# EAGLE board CSNE_Hirose_TDT_AdptBrd (EAGLE 7.4.0), part 1 of 2
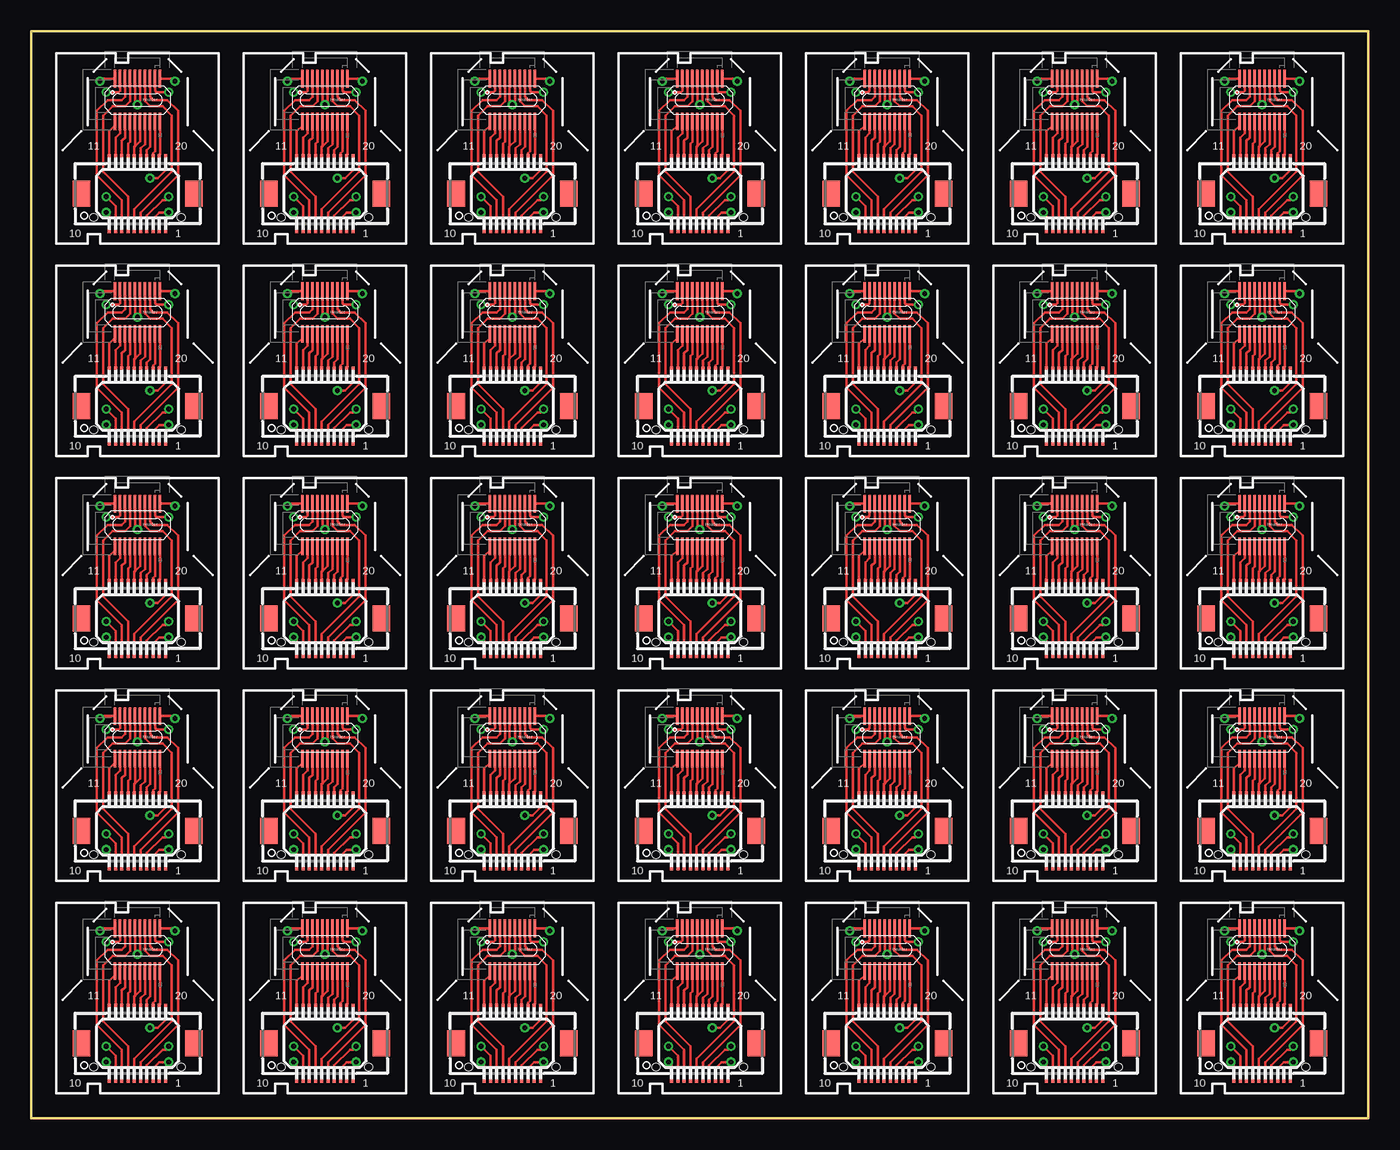
[diagram p0: board, top side]
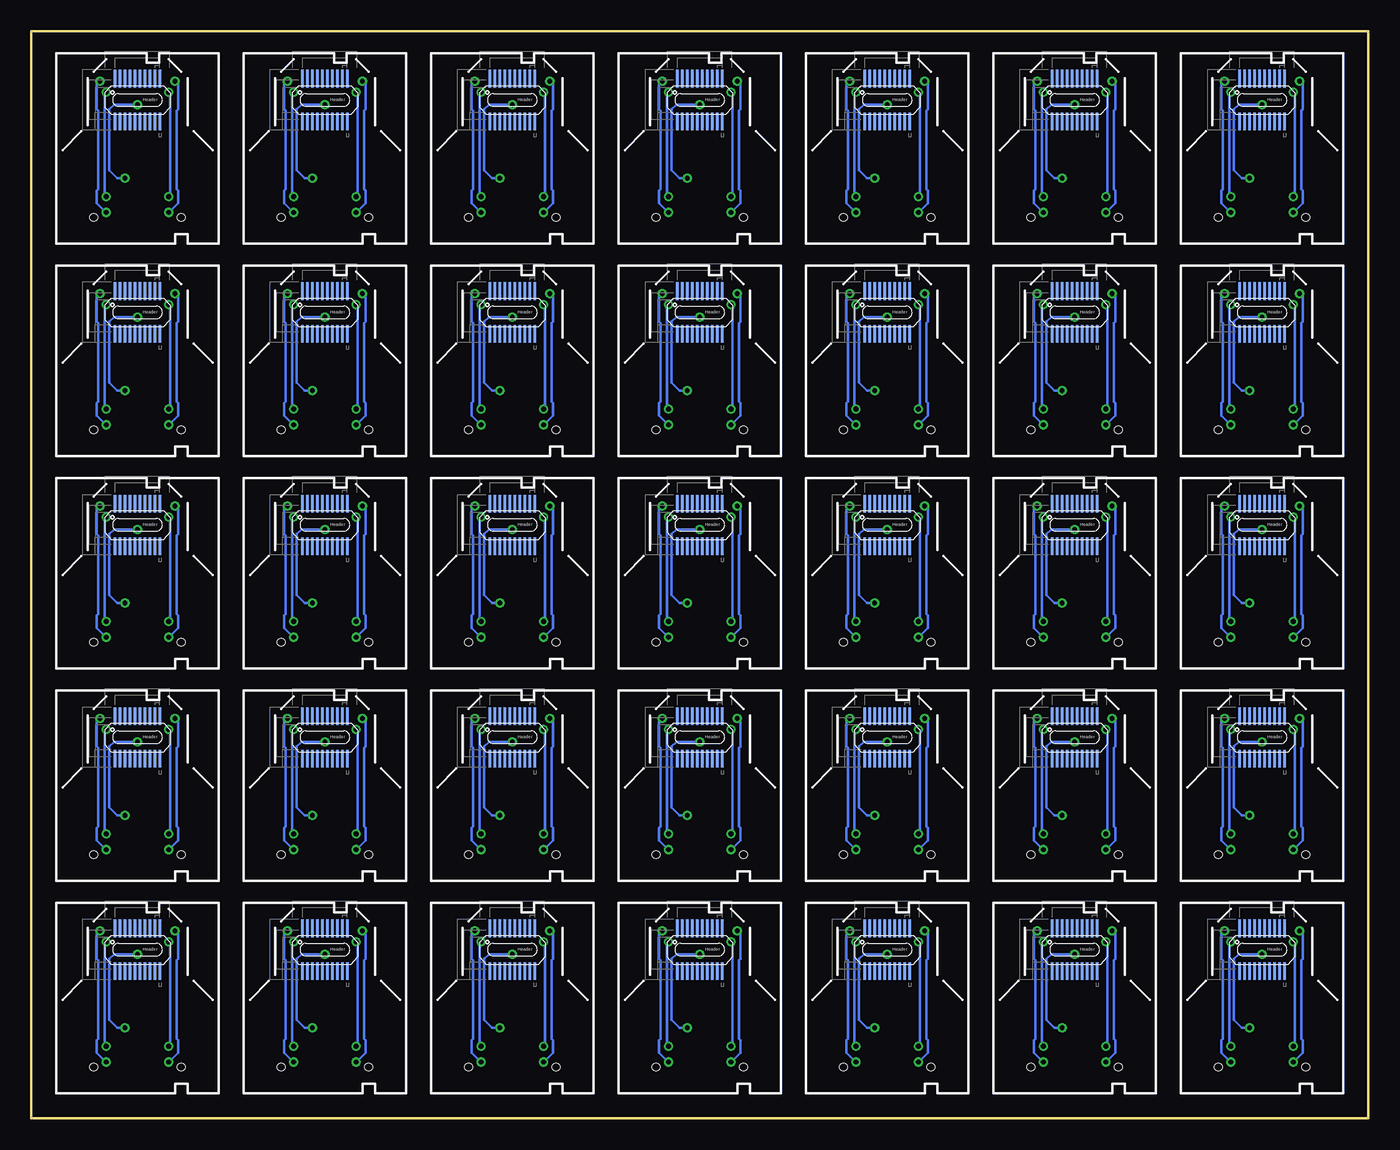
[diagram p1: board, bottom side, seen from below]

Size 107 x 87 mm. Coordinates in mm from the lower left corner, seen from the top.
Outline: 0,0 107,0 107,87 0,87 0,0
Copper layers (1*2*15*16): Top 0.035mm / dielectric 0.45mm / Route2 0.035mm / dielectric 0.5mm / Route15 0.035mm / dielectric 0.45mm / Bottom 0.035mm
Design rules "LaenPCBOrder_MOD_4layer": minimum track width 6mil, minimum drill 13mil, track to track 6mil, track to pad 6mil, pad to pad 6mil, via to via 6mil, smd to smd 6mil, copper to edge 15mil, drill to drill 6mil, minimum pad ring 7mil, minimum via ring 7mil, stop-mask expansion 3mil, vias tented up to drill 0mil, thermal gap 10mil

## Footprints (pad centres in the part's own frame; a part is rotated, then mirrored left to right if it is on the bottom)
DF30FC-20DP-0.4V = smd 0.23 x 1.4: P$1 -1.8,1.7; P$2 -1.4,1.7; P$3 -1,1.7; P$4 -0.6,1.7; P$5 -0.2,1.7; P$6 0.2,1.7; P$7 0.6,1.7; P$8 1,1.7; P$9 1.4,1.7; P$10 1.8,1.7; P$11 1.8,-1.7; P$12 1.4,-1.7; P$13 1,-1.7; P$14 0.6,-1.7; P$15 0.2,-1.7; P$16 -0.2,-1.7; P$17 -0.6,-1.7; P$18 -1,-1.7; P$19 -1.4,-1.7; P$20 -1.8,-1.7
CON-DF17-20F = smd 0.25 x 1.1: 1 -2.25,-2.6; 2 -2.25,2.6; 3 -1.75,-2.6; 4 -1.75,2.6; 5 -1.25,-2.6; 6 -1.25,2.6; 7 -0.75,-2.6; 8 -0.75,2.6; 9 -0.25,-2.6; 10 -0.25,2.6; 11 0.25,-2.6; 12 0.25,2.6; 13 0.75,-2.6; 14 0.75,2.6; 15 1.25,-2.6; 16 1.25,2.6; 17 1.75,-2.6; 18 1.75,2.6; 19 2.25,-2.6; 20 2.25,2.6 | smd 1.4 x 2.1: SIT1 -4.5,0; SIT2 4.5,0 | hole 0.6: -3.5,-1.9; 3.5,-1.9

## Placement (x,y rotation side)
U$1  DF30_HEADER  [DF30FC-20DP-0.4V]  8.5,13.5 0 top
U$2  DF30_HEADER  [DF30FC-20DP-0.4V]  8.5,13.5 0 bottom
U$3  CON-DF17-20F  [CON-DF17-20F]  8.5,6 0 top
U$4  DF30_HEADER  [DF30FC-20DP-0.4V]  8.5,30.5 0 bottom
U$5  DF30_HEADER  [DF30FC-20DP-0.4V]  8.5,30.5 0 top
U$6  CON-DF17-20F  [CON-DF17-20F]  8.5,23 0 top
U$7  DF30_HEADER  [DF30FC-20DP-0.4V]  23.5,30.5 0 bottom
U$8  DF30_HEADER  [DF30FC-20DP-0.4V]  23.5,30.5 0 top
U$9  CON-DF17-20F  [CON-DF17-20F]  23.5,23 0 top
U$10  DF30_HEADER  [DF30FC-20DP-0.4V]  23.5,13.5 0 bottom
U$11  DF30_HEADER  [DF30FC-20DP-0.4V]  23.5,13.5 0 top
U$12  CON-DF17-20F  [CON-DF17-20F]  23.5,6 0 top
U$13  DF30_HEADER  [DF30FC-20DP-0.4V]  8.5,47.5 0 bottom
U$14  DF30_HEADER  [DF30FC-20DP-0.4V]  8.5,47.5 0 top
U$15  CON-DF17-20F  [CON-DF17-20F]  8.5,40 0 top
U$16  DF30_HEADER  [DF30FC-20DP-0.4V]  8.5,64.5 0 bottom
U$17  DF30_HEADER  [DF30FC-20DP-0.4V]  8.5,64.5 0 top
U$18  CON-DF17-20F  [CON-DF17-20F]  8.5,57 0 top
U$19  DF30_HEADER  [DF30FC-20DP-0.4V]  23.5,64.5 0 bottom
U$20  DF30_HEADER  [DF30FC-20DP-0.4V]  23.5,64.5 0 top
U$21  CON-DF17-20F  [CON-DF17-20F]  23.5,57 0 top
U$22  DF30_HEADER  [DF30FC-20DP-0.4V]  23.5,47.5 0 bottom
U$23  DF30_HEADER  [DF30FC-20DP-0.4V]  23.5,47.5 0 top
U$24  CON-DF17-20F  [CON-DF17-20F]  23.5,40 0 top
U$25  DF30_HEADER  [DF30FC-20DP-0.4V]  38.5,13.5 0 bottom
U$26  DF30_HEADER  [DF30FC-20DP-0.4V]  38.5,13.5 0 top
U$27  CON-DF17-20F  [CON-DF17-20F]  38.5,6 0 top
U$28  DF30_HEADER  [DF30FC-20DP-0.4V]  38.5,30.5 0 bottom
U$29  DF30_HEADER  [DF30FC-20DP-0.4V]  38.5,30.5 0 top
U$30  CON-DF17-20F  [CON-DF17-20F]  38.5,23 0 top
U$31  DF30_HEADER  [DF30FC-20DP-0.4V]  53.5,30.5 0 bottom
U$32  DF30_HEADER  [DF30FC-20DP-0.4V]  53.5,30.5 0 top
U$33  CON-DF17-20F  [CON-DF17-20F]  53.5,23 0 top
U$34  DF30_HEADER  [DF30FC-20DP-0.4V]  53.5,13.5 0 bottom
U$35  DF30_HEADER  [DF30FC-20DP-0.4V]  53.5,13.5 0 top
U$36  CON-DF17-20F  [CON-DF17-20F]  53.5,6 0 top
U$37  DF30_HEADER  [DF30FC-20DP-0.4V]  68.5,13.5 0 bottom
U$38  DF30_HEADER  [DF30FC-20DP-0.4V]  68.5,13.5 0 top
U$39  CON-DF17-20F  [CON-DF17-20F]  68.5,6 0 top
U$40  DF30_HEADER  [DF30FC-20DP-0.4V]  68.5,30.5 0 bottom
U$41  DF30_HEADER  [DF30FC-20DP-0.4V]  68.5,30.5 0 top
U$42  CON-DF17-20F  [CON-DF17-20F]  68.5,23 0 top
U$43  DF30_HEADER  [DF30FC-20DP-0.4V]  83.5,30.5 0 bottom
U$44  DF30_HEADER  [DF30FC-20DP-0.4V]  83.5,30.5 0 top
U$45  CON-DF17-20F  [CON-DF17-20F]  83.5,23 0 top
U$46  DF30_HEADER  [DF30FC-20DP-0.4V]  83.5,13.5 0 bottom
U$47  DF30_HEADER  [DF30FC-20DP-0.4V]  83.5,13.5 0 top
U$48  CON-DF17-20F  [CON-DF17-20F]  83.5,6 0 top
U$49  DF30_HEADER  [DF30FC-20DP-0.4V]  68.5,47.5 0 bottom
U$50  DF30_HEADER  [DF30FC-20DP-0.4V]  68.5,47.5 0 top
U$51  CON-DF17-20F  [CON-DF17-20F]  68.5,40 0 top
U$52  DF30_HEADER  [DF30FC-20DP-0.4V]  68.5,64.5 0 bottom
U$53  DF30_HEADER  [DF30FC-20DP-0.4V]  68.5,64.5 0 top
U$54  CON-DF17-20F  [CON-DF17-20F]  68.5,57 0 top
U$55  DF30_HEADER  [DF30FC-20DP-0.4V]  83.5,64.5 0 bottom
U$56  DF30_HEADER  [DF30FC-20DP-0.4V]  83.5,64.5 0 top
U$57  CON-DF17-20F  [CON-DF17-20F]  83.5,57 0 top
U$58  DF30_HEADER  [DF30FC-20DP-0.4V]  83.5,47.5 0 bottom
U$59  DF30_HEADER  [DF30FC-20DP-0.4V]  83.5,47.5 0 top
U$60  CON-DF17-20F  [CON-DF17-20F]  83.5,40 0 top
U$61  DF30_HEADER  [DF30FC-20DP-0.4V]  38.5,47.5 0 bottom
U$62  DF30_HEADER  [DF30FC-20DP-0.4V]  38.5,47.5 0 top
U$63  CON-DF17-20F  [CON-DF17-20F]  38.5,40 0 top
U$64  DF30_HEADER  [DF30FC-20DP-0.4V]  38.5,64.5 0 bottom
U$65  DF30_HEADER  [DF30FC-20DP-0.4V]  38.5,64.5 0 top
U$66  CON-DF17-20F  [CON-DF17-20F]  38.5,57 0 top
U$67  DF30_HEADER  [DF30FC-20DP-0.4V]  53.5,64.5 0 bottom
U$68  DF30_HEADER  [DF30FC-20DP-0.4V]  53.5,64.5 0 top
U$69  CON-DF17-20F  [CON-DF17-20F]  53.5,57 0 top
U$70  DF30_HEADER  [DF30FC-20DP-0.4V]  53.5,47.5 0 bottom
U$71  DF30_HEADER  [DF30FC-20DP-0.4V]  53.5,47.5 0 top
U$72  CON-DF17-20F  [CON-DF17-20F]  53.5,40 0 top
U$73  DF30_HEADER  [DF30FC-20DP-0.4V]  8.5,81.5 0 bottom
U$74  DF30_HEADER  [DF30FC-20DP-0.4V]  8.5,81.5 0 top
U$75  CON-DF17-20F  [CON-DF17-20F]  8.5,74 0 top
U$76  DF30_HEADER  [DF30FC-20DP-0.4V]  23.5,81.5 0 bottom
U$77  DF30_HEADER  [DF30FC-20DP-0.4V]  23.5,81.5 0 top
U$78  CON-DF17-20F  [CON-DF17-20F]  23.5,74 0 top
U$79  DF30_HEADER  [DF30FC-20DP-0.4V]  68.5,81.5 0 bottom
U$80  DF30_HEADER  [DF30FC-20DP-0.4V]  68.5,81.5 0 top
U$81  CON-DF17-20F  [CON-DF17-20F]  68.5,74 0 top
U$82  DF30_HEADER  [DF30FC-20DP-0.4V]  83.5,81.5 0 bottom
U$83  DF30_HEADER  [DF30FC-20DP-0.4V]  83.5,81.5 0 top
U$84  CON-DF17-20F  [CON-DF17-20F]  83.5,74 0 top
U$85  DF30_HEADER  [DF30FC-20DP-0.4V]  38.5,81.5 0 bottom
U$86  DF30_HEADER  [DF30FC-20DP-0.4V]  38.5,81.5 0 top
U$87  CON-DF17-20F  [CON-DF17-20F]  38.5,74 0 top
U$88  DF30_HEADER  [DF30FC-20DP-0.4V]  53.5,81.5 0 bottom
U$89  DF30_HEADER  [DF30FC-20DP-0.4V]  53.5,81.5 0 top
U$90  CON-DF17-20F  [CON-DF17-20F]  53.5,74 0 top
U$91  DF30_HEADER  [DF30FC-20DP-0.4V]  98.5,30.5 0 bottom
U$92  DF30_HEADER  [DF30FC-20DP-0.4V]  98.5,30.5 0 top
U$93  CON-DF17-20F  [CON-DF17-20F]  98.5,23 0 top
U$94  DF30_HEADER  [DF30FC-20DP-0.4V]  98.5,13.5 0 bottom
U$95  DF30_HEADER  [DF30FC-20DP-0.4V]  98.5,13.5 0 top
U$96  CON-DF17-20F  [CON-DF17-20F]  98.5,6 0 top
U$97  DF30_HEADER  [DF30FC-20DP-0.4V]  98.5,64.5 0 bottom
U$98  DF30_HEADER  [DF30FC-20DP-0.4V]  98.5,64.5 0 top
U$99  CON-DF17-20F  [CON-DF17-20F]  98.5,57 0 top
U$100  DF30_HEADER  [DF30FC-20DP-0.4V]  98.5,47.5 0 bottom
U$101  DF30_HEADER  [DF30FC-20DP-0.4V]  98.5,47.5 0 top
U$102  CON-DF17-20F  [CON-DF17-20F]  98.5,40 0 top
U$103  DF30_HEADER  [DF30FC-20DP-0.4V]  98.5,81.5 0 bottom
U$104  DF30_HEADER  [DF30FC-20DP-0.4V]  98.5,81.5 0 top
U$105  CON-DF17-20F  [CON-DF17-20F]  98.5,74 0 top

## Library data of the parts
U$1 U$2 U$4 U$5 U$7 U$8 U$10 U$11 U$13 U$14 U$16 U$17 U$19 U$20 U$22 U$23 U$25 U$26 U$28 U$29 U$31 U$32 U$34 U$35 U$37 U$38 U$40 U$41 U$43 U$44 U$46 U$47 U$49 U$50 U$52 U$53 U$55 U$56 U$58 U$59 U$61 U$62 U$64 U$65 U$67 U$68 U$70 U$71 U$73 U$74 U$76 U$77 U$79 U$80 U$82 U$83 U$85 U$86 U$88 U$89 U$91 U$92 U$94 U$95 U$97 U$98 U$100 U$101 U$103 U$104 = TDT_Connectors
U$3 U$6 U$9 U$12 U$15 U$18 U$21 U$24 U$27 U$30 U$33 U$36 U$39 U$42 U$45 U$48 U$51 U$54 U$57 U$60 U$63 U$66 U$69 U$72 U$75 U$78 U$81 U$84 U$87 U$90 U$93 U$96 U$99 U$102 U$105 = hirose_DF17

## Nets
N$1: U$1.P$1 U$3.1
N$2: U$1.P$2 U$3.3
N$3: U$1.P$3 U$3.5
N$4: U$1.P$4 U$3.7
N$5: U$1.P$5 U$1.P$6 U$3.20
N$7: U$1.P$7 U$3.9
N$8: U$1.P$8 U$3.11
N$9: U$1.P$9 U$3.13
N$10: U$1.P$10 U$3.15
N$11: U$1.P$11 U$3.18
N$12: U$1.P$12 U$3.16
N$13: U$1.P$13 U$3.14
N$14: U$1.P$14 U$3.12
N$15: U$5.P$1 U$6.1
N$16: U$1.P$15 U$1.P$16 U$3.10
N$17: U$1.P$17 U$3.8
N$18: U$1.P$18 U$3.6
N$19: U$1.P$19 U$3.4
N$20: U$1.P$20 U$3.2
N$21: U$5.P$2 U$6.3
N$22: U$5.P$3 U$6.5
N$23: U$5.P$4 U$6.7
N$24: U$5.P$5 U$5.P$6 U$6.20
N$25: U$5.P$7 U$6.9
N$26: U$5.P$8 U$6.11
N$27: U$5.P$9 U$6.13
N$28: U$5.P$10 U$6.15
N$29: U$5.P$11 U$6.18
N$30: U$5.P$12 U$6.16
N$31: U$5.P$13 U$6.14
N$32: U$5.P$14 U$6.12
N$33: U$5.P$15 U$5.P$16 U$6.10
N$34: U$5.P$17 U$6.8
N$35: U$5.P$18 U$6.6
N$36: U$5.P$19 U$6.4
N$37: U$5.P$20 U$6.2
N$38: U$8.P$1 U$9.1
N$39: U$8.P$2 U$9.3
N$40: U$8.P$3 U$9.5
N$41: U$8.P$4 U$9.7
N$42: U$8.P$5 U$8.P$6 U$9.20
N$43: U$8.P$7 U$9.9
N$44: U$8.P$8 U$9.11
N$45: U$8.P$9 U$9.13
N$46: U$8.P$10 U$9.15
N$47: U$8.P$11 U$9.18
N$48: U$8.P$12 U$9.16
N$49: U$8.P$13 U$9.14
N$50: U$8.P$14 U$9.12
N$51: U$8.P$15 U$8.P$16 U$9.10
N$52: U$8.P$17 U$9.8
N$53: U$8.P$18 U$9.6
N$54: U$8.P$19 U$9.4
N$55: U$8.P$20 U$9.2
N$56: U$11.P$1 U$12.1
N$57: U$11.P$2 U$12.3
N$58: U$11.P$3 U$12.5
N$59: U$11.P$4 U$12.7
N$60: U$11.P$5 U$11.P$6 U$12.20
N$61: U$11.P$7 U$12.9
N$62: U$11.P$8 U$12.11
N$63: U$11.P$9 U$12.13
N$64: U$11.P$10 U$12.15
N$65: U$11.P$11 U$12.18
N$66: U$11.P$12 U$12.16
N$67: U$11.P$13 U$12.14
N$68: U$11.P$14 U$12.12
N$69: U$11.P$15 U$11.P$16 U$12.10
N$70: U$11.P$17 U$12.8
N$71: U$11.P$18 U$12.6
N$72: U$11.P$19 U$12.4
N$73: U$11.P$20 U$12.2
N$74: U$14.P$1 U$15.1
N$75: U$14.P$2 U$15.3
N$76: U$14.P$3 U$15.5
N$77: U$14.P$4 U$15.7
N$78: U$14.P$5 U$14.P$6 U$15.20
N$79: U$14.P$7 U$15.9
N$80: U$14.P$8 U$15.11
N$81: U$14.P$9 U$15.13
N$82: U$14.P$10 U$15.15
N$83: U$14.P$11 U$15.18
N$84: U$14.P$12 U$15.16
N$85: U$14.P$13 U$15.14
N$86: U$14.P$14 U$15.12
N$87: U$14.P$15 U$14.P$16 U$15.10
N$88: U$14.P$17 U$15.8
N$89: U$14.P$18 U$15.6
N$90: U$14.P$19 U$15.4
N$91: U$14.P$20 U$15.2
N$92: U$17.P$1 U$18.1
N$93: U$17.P$2 U$18.3
N$94: U$17.P$3 U$18.5
N$95: U$17.P$4 U$18.7
N$96: U$17.P$5 U$17.P$6 U$18.20
N$97: U$17.P$7 U$18.9
N$98: U$17.P$8 U$18.11
N$99: U$17.P$9 U$18.13
N$100: U$17.P$10 U$18.15
N$101: U$17.P$11 U$18.18
N$102: U$17.P$12 U$18.16
N$103: U$17.P$13 U$18.14
N$104: U$17.P$14 U$18.12
N$105: U$17.P$15 U$17.P$16 U$18.10
N$106: U$17.P$17 U$18.8
N$107: U$17.P$18 U$18.6
N$108: U$17.P$19 U$18.4
N$109: U$17.P$20 U$18.2
N$110: U$20.P$1 U$21.1
N$111: U$20.P$2 U$21.3
N$112: U$20.P$3 U$21.5
N$113: U$20.P$4 U$21.7
N$114: U$20.P$5 U$20.P$6 U$21.20
N$115: U$20.P$7 U$21.9
N$116: U$20.P$8 U$21.11
N$117: U$20.P$9 U$21.13
N$118: U$20.P$10 U$21.15
N$119: U$20.P$11 U$21.18
N$120: U$20.P$12 U$21.16
N$121: U$20.P$13 U$21.14
N$122: U$20.P$14 U$21.12
N$123: U$20.P$15 U$20.P$16 U$21.10
N$124: U$20.P$17 U$21.8
N$125: U$20.P$18 U$21.6
N$126: U$20.P$19 U$21.4
N$127: U$20.P$20 U$21.2
N$128: U$23.P$1 U$24.1
N$129: U$23.P$2 U$24.3
N$130: U$23.P$3 U$24.5
N$131: U$23.P$4 U$24.7
N$132: U$23.P$5 U$23.P$6 U$24.20
N$133: U$23.P$7 U$24.9
N$134: U$23.P$8 U$24.11
N$135: U$23.P$9 U$24.13
N$136: U$23.P$10 U$24.15
N$137: U$23.P$11 U$24.18
N$138: U$23.P$12 U$24.16
N$139: U$23.P$13 U$24.14
N$140: U$23.P$14 U$24.12
N$141: U$23.P$15 U$23.P$16 U$24.10
N$142: U$23.P$17 U$24.8
N$143: U$23.P$18 U$24.6
N$144: U$23.P$19 U$24.4
N$145: U$23.P$20 U$24.2
N$146: U$26.P$1 U$27.1
N$147: U$26.P$2 U$27.3
N$148: U$26.P$3 U$27.5
N$149: U$26.P$4 U$27.7
N$150: U$26.P$5 U$26.P$6 U$27.20
N$151: U$26.P$7 U$27.9
N$152: U$26.P$8 U$27.11
N$153: U$26.P$9 U$27.13
N$154: U$26.P$10 U$27.15
N$155: U$26.P$11 U$27.18
N$156: U$26.P$12 U$27.16
N$157: U$26.P$13 U$27.14
N$158: U$26.P$14 U$27.12
N$159: U$26.P$15 U$26.P$16 U$27.10
N$160: U$26.P$17 U$27.8
N$161: U$26.P$18 U$27.6
N$162: U$26.P$19 U$27.4
N$163: U$26.P$20 U$27.2
N$164: U$29.P$1 U$30.1
N$165: U$29.P$2 U$30.3
N$166: U$29.P$3 U$30.5
N$167: U$29.P$4 U$30.7
N$168: U$29.P$5 U$29.P$6 U$30.20
N$169: U$29.P$7 U$30.9
N$170: U$29.P$8 U$30.11
N$171: U$29.P$9 U$30.13
N$172: U$29.P$10 U$30.15
N$173: U$29.P$11 U$30.18
N$174: U$29.P$12 U$30.16
N$175: U$29.P$13 U$30.14
N$176: U$29.P$14 U$30.12
N$177: U$29.P$15 U$29.P$16 U$30.10
N$178: U$29.P$17 U$30.8
N$179: U$29.P$18 U$30.6
N$180: U$29.P$19 U$30.4
N$181: U$29.P$20 U$30.2
N$182: U$32.P$1 U$33.1
N$183: U$32.P$2 U$33.3
N$184: U$32.P$3 U$33.5
N$185: U$32.P$4 U$33.7
N$186: U$32.P$5 U$32.P$6 U$33.20
N$187: U$32.P$7 U$33.9
N$188: U$32.P$8 U$33.11
N$189: U$32.P$9 U$33.13
N$190: U$32.P$10 U$33.15
N$191: U$32.P$11 U$33.18
N$192: U$32.P$12 U$33.16
N$193: U$32.P$13 U$33.14
N$194: U$32.P$14 U$33.12
N$195: U$32.P$15 U$32.P$16 U$33.10
N$196: U$32.P$17 U$33.8
N$197: U$32.P$18 U$33.6
N$198: U$32.P$19 U$33.4
N$199: U$32.P$20 U$33.2
N$200: U$35.P$1 U$36.1
N$201: U$35.P$2 U$36.3
N$202: U$35.P$3 U$36.5
N$203: U$35.P$4 U$36.7
N$204: U$35.P$5 U$35.P$6 U$36.20
N$205: U$35.P$7 U$36.9
N$206: U$35.P$8 U$36.11
N$207: U$35.P$9 U$36.13
N$208: U$35.P$10 U$36.15
N$209: U$35.P$11 U$36.18
N$210: U$35.P$12 U$36.16
N$211: U$35.P$13 U$36.14
N$212: U$35.P$14 U$36.12
N$213: U$35.P$15 U$35.P$16 U$36.10
N$214: U$35.P$17 U$36.8
N$215: U$35.P$18 U$36.6
N$216: U$35.P$19 U$36.4
N$217: U$35.P$20 U$36.2
N$218: U$38.P$1 U$39.1
N$219: U$38.P$2 U$39.3
N$220: U$38.P$3 U$39.5
N$221: U$38.P$4 U$39.7
N$222: U$38.P$5 U$38.P$6 U$39.20
N$223: U$38.P$7 U$39.9
N$224: U$38.P$8 U$39.11
N$225: U$38.P$9 U$39.13
N$226: U$38.P$10 U$39.15
N$227: U$38.P$11 U$39.18
N$228: U$38.P$12 U$39.16
N$229: U$38.P$13 U$39.14
N$230: U$38.P$14 U$39.12
N$231: U$38.P$15 U$38.P$16 U$39.10
N$232: U$38.P$17 U$39.8
N$233: U$38.P$18 U$39.6
N$234: U$38.P$19 U$39.4
N$235: U$38.P$20 U$39.2
N$236: U$41.P$1 U$42.1
N$237: U$41.P$2 U$42.3
N$238: U$41.P$3 U$42.5
N$239: U$41.P$4 U$42.7
N$240: U$41.P$5 U$41.P$6 U$42.20
N$241: U$41.P$7 U$42.9
N$242: U$41.P$8 U$42.11
N$243: U$41.P$9 U$42.13
N$244: U$41.P$10 U$42.15
N$245: U$41.P$11 U$42.18
N$246: U$41.P$12 U$42.16
N$247: U$41.P$13 U$42.14
N$248: U$41.P$14 U$42.12
N$249: U$41.P$15 U$41.P$16 U$42.10
N$250: U$41.P$17 U$42.8
N$251: U$41.P$18 U$42.6
N$252: U$41.P$19 U$42.4
N$253: U$41.P$20 U$42.2
N$254: U$44.P$1 U$45.1
N$255: U$44.P$2 U$45.3
N$256: U$44.P$3 U$45.5
N$257: U$44.P$4 U$45.7
N$258: U$44.P$5 U$44.P$6 U$45.20
N$259: U$44.P$7 U$45.9
N$260: U$44.P$8 U$45.11
N$261: U$44.P$9 U$45.13
N$262: U$44.P$10 U$45.15
N$263: U$44.P$11 U$45.18
N$264: U$44.P$12 U$45.16
N$265: U$44.P$13 U$45.14
N$266: U$44.P$14 U$45.12
N$267: U$44.P$15 U$44.P$16 U$45.10
N$268: U$44.P$17 U$45.8
N$269: U$44.P$18 U$45.6
N$270: U$44.P$19 U$45.4
N$271: U$44.P$20 U$45.2
N$272: U$47.P$1 U$48.1
N$273: U$47.P$2 U$48.3
N$274: U$47.P$3 U$48.5
N$275: U$47.P$4 U$48.7
N$276: U$47.P$5 U$47.P$6 U$48.20
N$277: U$47.P$7 U$48.9
N$278: U$47.P$8 U$48.11
N$279: U$47.P$9 U$48.13
N$280: U$47.P$10 U$48.15
N$281: U$47.P$11 U$48.18
N$282: U$47.P$12 U$48.16
N$283: U$47.P$13 U$48.14
N$284: U$47.P$14 U$48.12
N$285: U$47.P$15 U$47.P$16 U$48.10
N$286: U$47.P$17 U$48.8
N$287: U$47.P$18 U$48.6
N$288: U$47.P$19 U$48.4
N$289: U$47.P$20 U$48.2
N$290: U$50.P$1 U$51.1
N$291: U$50.P$2 U$51.3
N$292: U$50.P$3 U$51.5
N$293: U$50.P$4 U$51.7
N$294: U$50.P$5 U$50.P$6 U$51.20
N$295: U$50.P$7 U$51.9
N$296: U$50.P$8 U$51.11
N$297: U$50.P$9 U$51.13
N$298: U$50.P$10 U$51.15
N$299: U$50.P$11 U$51.18
N$300: U$50.P$12 U$51.16
N$301: U$50.P$13 U$51.14
N$302: U$50.P$14 U$51.12
N$303: U$50.P$15 U$50.P$16 U$51.10
N$304: U$50.P$17 U$51.8
N$305: U$50.P$18 U$51.6
N$306: U$50.P$19 U$51.4
N$307: U$50.P$20 U$51.2
N$308: U$53.P$1 U$54.1
N$309: U$53.P$2 U$54.3
N$310: U$53.P$3 U$54.5
N$311: U$53.P$4 U$54.7
N$312: U$53.P$5 U$53.P$6 U$54.20
N$313: U$53.P$7 U$54.9
N$314: U$53.P$8 U$54.11
N$315: U$53.P$9 U$54.13
N$316: U$53.P$10 U$54.15
N$317: U$53.P$11 U$54.18
N$318: U$53.P$12 U$54.16
N$319: U$53.P$13 U$54.14
N$320: U$53.P$14 U$54.12
N$321: U$53.P$15 U$53.P$16 U$54.10
N$322: U$53.P$17 U$54.8
N$323: U$53.P$18 U$54.6
N$324: U$53.P$19 U$54.4
N$325: U$53.P$20 U$54.2
N$326: U$56.P$1 U$57.1
N$327: U$56.P$2 U$57.3
N$328: U$56.P$3 U$57.5
N$329: U$56.P$4 U$57.7
N$330: U$56.P$5 U$56.P$6 U$57.20
N$331: U$56.P$7 U$57.9
N$332: U$56.P$8 U$57.11
N$333: U$56.P$9 U$57.13
N$334: U$56.P$10 U$57.15
N$335: U$56.P$11 U$57.18
N$336: U$56.P$12 U$57.16
N$337: U$56.P$13 U$57.14
N$338: U$56.P$14 U$57.12
N$339: U$56.P$15 U$56.P$16 U$57.10
N$340: U$56.P$17 U$57.8
N$341: U$56.P$18 U$57.6
N$342: U$56.P$19 U$57.4
N$343: U$56.P$20 U$57.2
N$344: U$59.P$1 U$60.1
N$345: U$59.P$2 U$60.3
N$346: U$59.P$3 U$60.5
N$347: U$59.P$4 U$60.7
N$348: U$59.P$5 U$59.P$6 U$60.20
N$349: U$59.P$7 U$60.9
N$350: U$59.P$8 U$60.11
N$351: U$59.P$9 U$60.13
N$352: U$59.P$10 U$60.15
N$353: U$59.P$11 U$60.18
N$354: U$59.P$12 U$60.16
N$355: U$59.P$13 U$60.14
N$356: U$59.P$14 U$60.12
N$357: U$59.P$15 U$59.P$16 U$60.10
N$358: U$59.P$17 U$60.8
N$359: U$59.P$18 U$60.6
N$360: U$59.P$19 U$60.4
N$361: U$59.P$20 U$60.2
N$362: U$62.P$1 U$63.1
N$363: U$62.P$2 U$63.3
N$364: U$62.P$3 U$63.5
N$365: U$62.P$4 U$63.7
N$366: U$62.P$5 U$62.P$6 U$63.20
N$367: U$62.P$7 U$63.9
N$368: U$62.P$8 U$63.11
N$369: U$62.P$9 U$63.13
N$370: U$62.P$10 U$63.15
N$371: U$62.P$11 U$63.18
N$372: U$62.P$12 U$63.16
N$373: U$62.P$13 U$63.14
N$374: U$62.P$14 U$63.12
N$375: U$62.P$15 U$62.P$16 U$63.10
N$376: U$62.P$17 U$63.8
N$377: U$62.P$18 U$63.6
N$378: U$62.P$19 U$63.4
N$379: U$62.P$20 U$63.2
N$380: U$65.P$1 U$66.1
N$381: U$65.P$2 U$66.3
N$382: U$65.P$3 U$66.5
N$383: U$65.P$4 U$66.7
N$384: U$65.P$5 U$65.P$6 U$66.20
N$385: U$65.P$7 U$66.9
N$386: U$65.P$8 U$66.11
N$387: U$65.P$9 U$66.13
N$388: U$65.P$10 U$66.15
N$389: U$65.P$11 U$66.18
N$390: U$65.P$12 U$66.16
N$391: U$65.P$13 U$66.14
N$392: U$65.P$14 U$66.12
N$393: U$65.P$15 U$65.P$16 U$66.10
N$394: U$65.P$17 U$66.8
N$395: U$65.P$18 U$66.6
N$396: U$65.P$19 U$66.4
N$397: U$65.P$20 U$66.2
N$398: U$68.P$1 U$69.1
N$399: U$68.P$2 U$69.3
N$400: U$68.P$3 U$69.5
N$401: U$68.P$4 U$69.7
N$402: U$68.P$5 U$68.P$6 U$69.20
N$403: U$68.P$7 U$69.9
N$404: U$68.P$8 U$69.11
N$405: U$68.P$9 U$69.13
N$406: U$68.P$10 U$69.15
N$407: U$68.P$11 U$69.18
N$408: U$68.P$12 U$69.16
N$409: U$68.P$13 U$69.14
N$410: U$68.P$14 U$69.12
N$411: U$68.P$15 U$68.P$16 U$69.10
N$412: U$68.P$17 U$69.8
N$413: U$68.P$18 U$69.6
N$414: U$68.P$19 U$69.4
N$415: U$68.P$20 U$69.2
N$416: U$71.P$1 U$72.1
N$417: U$71.P$2 U$72.3
N$418: U$71.P$3 U$72.5
N$419: U$71.P$4 U$72.7
N$420: U$71.P$5 U$71.P$6 U$72.20
N$421: U$71.P$7 U$72.9
N$422: U$71.P$8 U$72.11
N$423: U$71.P$9 U$72.13
N$424: U$71.P$10 U$72.15
N$425: U$71.P$11 U$72.18
N$426: U$71.P$12 U$72.16
N$427: U$71.P$13 U$72.14
N$428: U$71.P$14 U$72.12
N$429: U$71.P$15 U$71.P$16 U$72.10
N$430: U$71.P$17 U$72.8
N$431: U$71.P$18 U$72.6
N$432: U$71.P$19 U$72.4
N$433: U$71.P$20 U$72.2
N$434: U$74.P$1 U$75.1
N$435: U$74.P$2 U$75.3
N$436: U$74.P$3 U$75.5
N$437: U$74.P$4 U$75.7
N$438: U$74.P$5 U$74.P$6 U$75.20
N$439: U$74.P$7 U$75.9
N$440: U$74.P$8 U$75.11
N$441: U$74.P$9 U$75.13
N$442: U$74.P$10 U$75.15
N$443: U$74.P$11 U$75.18
N$444: U$74.P$12 U$75.16
N$445: U$74.P$13 U$75.14
N$446: U$74.P$14 U$75.12
N$447: U$74.P$15 U$74.P$16 U$75.10
N$448: U$74.P$17 U$75.8
N$449: U$74.P$18 U$75.6
N$450: U$74.P$19 U$75.4
N$451: U$74.P$20 U$75.2
N$452: U$77.P$1 U$78.1
N$453: U$77.P$2 U$78.3
N$454: U$77.P$3 U$78.5
N$455: U$77.P$4 U$78.7
N$456: U$77.P$5 U$77.P$6 U$78.20
N$457: U$77.P$7 U$78.9
N$458: U$77.P$8 U$78.11
N$459: U$77.P$9 U$78.13
N$460: U$77.P$10 U$78.15
N$461: U$77.P$11 U$78.18
N$462: U$77.P$12 U$78.16
N$463: U$77.P$13 U$78.14
N$464: U$77.P$14 U$78.12
N$465: U$77.P$15 U$77.P$16 U$78.10
N$466: U$77.P$17 U$78.8
N$467: U$77.P$18 U$78.6
N$468: U$77.P$19 U$78.4
N$469: U$77.P$20 U$78.2
N$470: U$80.P$1 U$81.1
N$471: U$80.P$2 U$81.3
N$472: U$80.P$3 U$81.5
N$473: U$80.P$4 U$81.7
N$474: U$80.P$5 U$80.P$6 U$81.20
N$475: U$80.P$7 U$81.9
N$476: U$80.P$8 U$81.11
N$477: U$80.P$9 U$81.13
N$478: U$80.P$10 U$81.15
N$479: U$80.P$11 U$81.18
N$480: U$80.P$12 U$81.16
N$481: U$80.P$13 U$81.14
N$482: U$80.P$14 U$81.12
N$483: U$80.P$15 U$80.P$16 U$81.10
N$484: U$80.P$17 U$81.8
N$485: U$80.P$18 U$81.6
N$486: U$80.P$19 U$81.4
N$487: U$80.P$20 U$81.2
N$488: U$83.P$1 U$84.1
N$489: U$83.P$2 U$84.3
N$490: U$83.P$3 U$84.5
N$491: U$83.P$4 U$84.7
N$492: U$83.P$5 U$83.P$6 U$84.20
N$493: U$83.P$7 U$84.9
N$494: U$83.P$8 U$84.11
N$495: U$83.P$9 U$84.13
N$496: U$83.P$10 U$84.15
N$497: U$83.P$11 U$84.18
N$498: U$83.P$12 U$84.16
N$499: U$83.P$13 U$84.14
N$500: U$83.P$14 U$84.12
N$501: U$83.P$15 U$83.P$16 U$84.10
N$502: U$83.P$17 U$84.8
N$503: U$83.P$18 U$84.6
N$504: U$83.P$19 U$84.4
N$505: U$83.P$20 U$84.2
N$506: U$86.P$1 U$87.1
N$507: U$86.P$2 U$87.3
N$508: U$86.P$3 U$87.5
N$509: U$86.P$4 U$87.7
N$510: U$86.P$5 U$86.P$6 U$87.20
N$511: U$86.P$7 U$87.9
N$512: U$86.P$8 U$87.11
N$513: U$86.P$9 U$87.13
N$514: U$86.P$10 U$87.15
N$515: U$86.P$11 U$87.18
N$516: U$86.P$12 U$87.16
N$517: U$86.P$13 U$87.14
N$518: U$86.P$14 U$87.12
N$519: U$86.P$15 U$86.P$16 U$87.10
N$520: U$86.P$17 U$87.8
N$521: U$86.P$18 U$87.6
N$522: U$86.P$19 U$87.4
N$523: U$86.P$20 U$87.2
N$524: U$89.P$1 U$90.1
N$525: U$89.P$2 U$90.3
N$526: U$89.P$3 U$90.5
N$527: U$89.P$4 U$90.7
N$528: U$89.P$5 U$89.P$6 U$90.20
N$529: U$89.P$7 U$90.9
N$530: U$89.P$8 U$90.11
N$531: U$89.P$9 U$90.13
N$532: U$89.P$10 U$90.15
N$533: U$89.P$11 U$90.18
N$534: U$89.P$12 U$90.16
N$535: U$89.P$13 U$90.14
N$536: U$89.P$14 U$90.12
N$537: U$89.P$15 U$89.P$16 U$90.10
N$538: U$89.P$17 U$90.8
N$539: U$89.P$18 U$90.6
N$540: U$89.P$19 U$90.4
N$541: U$89.P$20 U$90.2
N$542: U$92.P$1 U$93.1
N$543: U$92.P$2 U$93.3
N$544: U$92.P$3 U$93.5
N$545: U$92.P$4 U$93.7
N$546: U$92.P$5 U$92.P$6 U$93.20
N$547: U$92.P$7 U$93.9
N$548: U$92.P$8 U$93.11
N$549: U$92.P$9 U$93.13
N$550: U$92.P$10 U$93.15
N$551: U$92.P$11 U$93.18
N$552: U$92.P$12 U$93.16
N$553: U$92.P$13 U$93.14
N$554: U$92.P$14 U$93.12
N$555: U$92.P$15 U$92.P$16 U$93.10
N$556: U$92.P$17 U$93.8
N$557: U$92.P$18 U$93.6
N$558: U$92.P$19 U$93.4
N$559: U$92.P$20 U$93.2
N$560: U$95.P$1 U$96.1
N$561: U$95.P$2 U$96.3
N$562: U$95.P$3 U$96.5
N$563: U$95.P$4 U$96.7
N$564: U$95.P$5 U$95.P$6 U$96.20
N$565: U$95.P$7 U$96.9
N$566: U$95.P$8 U$96.11
N$567: U$95.P$9 U$96.13
N$568: U$95.P$10 U$96.15
N$569: U$95.P$11 U$96.18
N$570: U$95.P$12 U$96.16
N$571: U$95.P$13 U$96.14
N$572: U$95.P$14 U$96.12
N$573: U$95.P$15 U$95.P$16 U$96.10
N$574: U$95.P$17 U$96.8
N$575: U$95.P$18 U$96.6
N$576: U$95.P$19 U$96.4
N$577: U$95.P$20 U$96.2
N$578: U$98.P$1 U$99.1
N$579: U$98.P$2 U$99.3
N$580: U$98.P$3 U$99.5
N$581: U$98.P$4 U$99.7
N$582: U$98.P$5 U$98.P$6 U$99.20
N$583: U$98.P$7 U$99.9
N$584: U$98.P$8 U$99.11
N$585: U$98.P$9 U$99.13
N$586: U$98.P$10 U$99.15
N$587: U$98.P$11 U$99.18
N$588: U$98.P$12 U$99.16
N$589: U$98.P$13 U$99.14
N$590: U$98.P$14 U$99.12
N$591: U$98.P$15 U$98.P$16 U$99.10
N$592: U$98.P$17 U$99.8
N$593: U$98.P$18 U$99.6
N$594: U$98.P$19 U$99.4
N$595: U$98.P$20 U$99.2
N$596: U$101.P$1 U$102.1
N$597: U$101.P$2 U$102.3
N$598: U$101.P$3 U$102.5
N$599: U$101.P$4 U$102.7
N$600: U$101.P$5 U$101.P$6 U$102.20
N$601: U$101.P$7 U$102.9
N$602: U$101.P$8 U$102.11
N$603: U$101.P$9 U$102.13
N$604: U$101.P$10 U$102.15
N$605: U$101.P$11 U$102.18
N$606: U$101.P$12 U$102.16
N$607: U$101.P$13 U$102.14
N$608: U$101.P$14 U$102.12
N$609: U$101.P$15 U$101.P$16 U$102.10
N$610: U$101.P$17 U$102.8
N$611: U$101.P$18 U$102.6
N$612: U$101.P$19 U$102.4
N$613: U$101.P$20 U$102.2
N$614: U$104.P$1 U$105.1
N$615: U$104.P$2 U$105.3
N$616: U$104.P$3 U$105.5
N$617: U$104.P$4 U$105.7
N$618: U$104.P$5 U$104.P$6 U$105.20
N$619: U$104.P$7 U$105.9
N$620: U$104.P$8 U$105.11
N$621: U$104.P$9 U$105.13
N$622: U$104.P$10 U$105.15
N$623: U$104.P$11 U$105.18
N$624: U$104.P$12 U$105.16
N$625: U$104.P$13 U$105.14
N$626: U$104.P$14 U$105.12
N$627: U$104.P$15 U$104.P$16 U$105.10
N$628: U$104.P$17 U$105.8
N$629: U$104.P$18 U$105.6
N$630: U$104.P$19 U$105.4
N$631: U$104.P$20 U$105.2

## Tracks (layer width: path | path; a pad name or v marks a point on that pad's centre or on a via)
N$1  (via drill 0.38)
  Top 0.203: U$1.P$1 5.7,15.2 v5.5,15 | U$3.1 6.25,4.25 v6,4.5
  Bottom 0.203: v5.5,15 5.25,14.75 5.25,12.75 5.38,12.62 5.38,6.38 5.25,6.25 5.25,5.25 v6,4.5
N$2  (via drill 0.38)
  Top 0.203: U$1.P$2 7.1,14.22 7,14.12 v6,14.12 | U$3.3 6.75,5 v6,5.75
  Bottom 0.203: v6,14.12 5.88,14 5.88,5.88 v6,5.75
N$3
  Top 0.203: U$1.P$3 7.5,13.75 7.25,13.5 6.12,13.5 5.25,12.62 5.25,7.5 7.25,5.5 U$3.5
N$4
  Top 0.203: U$1.P$4 7.9,13.4 7.5,13 6.5,13 5.75,12.25 5.75,7.75 7.75,5.75 U$3.7
N$5  (via drill 0.38)
  Top 0.203: U$1.P$5 8.3,13.32 v8.5,13.12 8.7,13.32 U$1.P$6 | v9.5,7.25 10.12,7.25 10.75,7.88 U$3.20
  Bottom 0.203: v8.5,13.12 10.38,13.12 10.75,12.75 10.75,7.88 10.12,7.25 v9.5,7.25
N$7
  Top 0.203: U$1.P$7 9.1,13.4 9.5,13 10.5,13 11.25,12.25 11.25,7.75 8.25,4.75 U$3.9
N$8
  Top 0.203: U$1.P$8 9.5,13.75 9.75,13.5 10.88,13.5 11.75,12.62 11.75,7.5 8.75,4.5 U$3.11
N$9  (via drill 0.38)
  Top 0.203: U$1.P$9 9.9,14.22 10,14.12 v11,14.12 | U$3.13 9.25,4.25 10.5,5.5 10.75,5.5 v11,5.75
  Bottom 0.203: v11,14.12 11.12,14 11.12,5.88 v11,5.75
N$10  (via drill 0.38)
  Top 0.203: U$1.P$10 11.3,15.2 v11.5,15 | v11,4.5 10.25,4.5 9.75,4 U$3.15
  Bottom 0.203: v11.5,15 11.75,14.75 11.75,12.75 11.62,12.62 11.62,6.38 11.75,6.25 11.75,5.25 v11,4.5
N$11
  Top 0.203: U$1.P$11 10.3,9.18 10.25,9.12 U$3.18
N$12
  Top 0.203: U$1.P$12 9.9,9.4 9.75,9.25 U$3.16
N$13
  Top 0.203: U$1.P$13 9.5,9.75 9.25,9.5 U$3.14
N$14
  Top 0.203: U$1.P$14 9.1,9.97 8.75,9.62 U$3.12
N$15  (via drill 0.38)
  Top 0.203: U$5.P$1 5.7,32.2 v5.5,32 | U$6.1 6.25,21.25 v6,21.5
  Bottom 0.203: v5.5,32 5.25,31.75 5.25,29.75 5.38,29.62 5.38,23.38 5.25,23.25 5.25,22.25 v6,21.5
N$16
  Top 0.203: U$1.P$16 8.3,9.8 | 8.3,9.8 8.25,9.75 U$3.10 | U$1.P$15 8.7,10.2 8.3,9.8
N$17
  Top 0.203: U$1.P$17 7.9,10.15 7.75,10 U$3.8
N$18
  Top 0.203: U$1.P$18 7.5,10.5 7.25,10.25 U$3.6
N$19
  Top 0.203: U$1.P$19 7.1,10.85 6.75,10.5 U$3.4
N$20
  Top 0.203: U$1.P$20 6.7,11.45 6.25,11 U$3.2
N$21  (via drill 0.38)
  Top 0.203: U$5.P$2 7.1,31.23 7,31.12 v6,31.12 | U$6.3 6.75,22 v6,22.75
  Bottom 0.203: v6,31.12 5.88,31 5.88,22.88 v6,22.75
N$22
  Top 0.203: U$5.P$3 7.5,30.75 7.25,30.5 6.12,30.5 5.25,29.62 5.25,24.5 7.25,22.5 U$6.5
N$23
  Top 0.203: U$5.P$4 7.9,30.4 7.5,30 6.5,30 5.75,29.25 5.75,24.75 7.75,22.75 U$6.7
N$24  (via drill 0.38)
  Top 0.203: U$5.P$5 8.3,30.32 v8.5,30.12 8.7,30.32 U$5.P$6 | v9.5,24.25 10.12,24.25 10.75,24.88 U$6.20
  Bottom 0.203: v8.5,30.12 10.38,30.12 10.75,29.75 10.75,24.88 10.12,24.25 v9.5,24.25
N$25
  Top 0.203: U$5.P$7 9.1,30.4 9.5,30 10.5,30 11.25,29.25 11.25,24.75 8.25,21.75 U$6.9
N$26
  Top 0.203: U$5.P$8 9.5,30.75 9.75,30.5 10.88,30.5 11.75,29.62 11.75,24.5 8.75,21.5 U$6.11
N$27  (via drill 0.38)
  Top 0.203: U$5.P$9 9.9,31.23 10,31.12 v11,31.12 | U$6.13 9.25,21.25 10.5,22.5 10.75,22.5 v11,22.75
  Bottom 0.203: v11,31.12 11.12,31 11.12,22.88 v11,22.75
N$28  (via drill 0.38)
  Top 0.203: U$5.P$10 11.3,32.2 v11.5,32 | v11,21.5 10.25,21.5 9.75,21 U$6.15
  Bottom 0.203: v11.5,32 11.75,31.75 11.75,29.75 11.62,29.62 11.62,23.38 11.75,23.25 11.75,22.25 v11,21.5
N$29
  Top 0.203: U$5.P$11 10.3,26.18 10.25,26.12 U$6.18
N$30
  Top 0.203: U$5.P$12 9.9,26.4 9.75,26.25 U$6.16
N$31
  Top 0.203: U$5.P$13 9.5,26.75 9.25,26.5 U$6.14
N$32
  Top 0.203: U$5.P$14 9.1,26.98 8.75,26.62 U$6.12
N$33
  Top 0.203: U$5.P$16 8.3,26.8 | 8.3,26.8 8.25,26.75 U$6.10 | U$5.P$15 8.7,27.2 8.3,26.8
N$34
  Top 0.203: U$5.P$17 7.9,27.15 7.75,27 U$6.8
N$35
  Top 0.203: U$5.P$18 7.5,27.5 7.25,27.25 U$6.6
N$36
  Top 0.203: U$5.P$19 7.1,27.85 6.75,27.5 U$6.4
N$37
  Top 0.203: U$5.P$20 6.7,28.45 6.25,28 U$6.2
N$38  (via drill 0.38)
  Top 0.203: U$8.P$1 20.7,32.2 v20.5,32 | U$9.1 21.25,21.25 v21,21.5
  Bottom 0.203: v20.5,32 20.25,31.75 20.25,29.75 20.38,29.62 20.38,23.38 20.25,23.25 20.25,22.25 v21,21.5
N$39  (via drill 0.38)
  Top 0.203: U$8.P$2 22.1,31.23 22,31.12 v21,31.12 | U$9.3 21.75,22 v21,22.75
  Bottom 0.203: v21,31.12 20.88,31 20.88,22.88 v21,22.75
N$40
  Top 0.203: U$8.P$3 22.5,30.75 22.25,30.5 21.12,30.5 20.25,29.62 20.25,24.5 22.25,22.5 U$9.5
N$41
  Top 0.203: U$8.P$4 22.9,30.4 22.5,30 21.5,30 20.75,29.25 20.75,24.75 22.75,22.75 U$9.7
N$42  (via drill 0.38)
  Top 0.203: U$8.P$5 23.3,30.32 v23.5,30.12 23.7,30.32 U$8.P$6 | v24.5,24.25 25.12,24.25 25.75,24.88 U$9.20
  Bottom 0.203: v23.5,30.12 25.38,30.12 25.75,29.75 25.75,24.88 25.12,24.25 v24.5,24.25
N$43
  Top 0.203: U$8.P$7 24.1,30.4 24.5,30 25.5,30 26.25,29.25 26.25,24.75 23.25,21.75 U$9.9
N$44
  Top 0.203: U$8.P$8 24.5,30.75 24.75,30.5 25.88,30.5 26.75,29.62 26.75,24.5 23.75,21.5 U$9.11
N$45  (via drill 0.38)
  Top 0.203: U$8.P$9 24.9,31.23 25,31.12 v26,31.12 | U$9.13 24.25,21.25 25.5,22.5 25.75,22.5 v26,22.75
  Bottom 0.203: v26,31.12 26.12,31 26.12,22.88 v26,22.75
N$46  (via drill 0.38)
  Top 0.203: U$8.P$10 26.3,32.2 v26.5,32 | v26,21.5 25.25,21.5 24.75,21 U$9.15
  Bottom 0.203: v26.5,32 26.75,31.75 26.75,29.75 26.62,29.62 26.62,23.38 26.75,23.25 26.75,22.25 v26,21.5
N$47
  Top 0.203: U$8.P$11 25.3,26.18 25.25,26.12 U$9.18
N$48
  Top 0.203: U$8.P$12 24.9,26.4 24.75,26.25 U$9.16
N$49
  Top 0.203: U$8.P$13 24.5,26.75 24.25,26.5 U$9.14
N$50
  Top 0.203: U$8.P$14 24.1,26.98 23.75,26.62 U$9.12
N$51
  Top 0.203: U$8.P$16 23.3,26.8 | 23.3,26.8 23.25,26.75 U$9.10 | U$8.P$15 23.7,27.2 23.3,26.8
N$52
  Top 0.203: U$8.P$17 22.9,27.15 22.75,27 U$9.8
N$53
  Top 0.203: U$8.P$18 22.5,27.5 22.25,27.25 U$9.6
N$54
  Top 0.203: U$8.P$19 22.1,27.85 21.75,27.5 U$9.4
N$55
  Top 0.203: U$8.P$20 21.7,28.45 21.25,28 U$9.2
N$56  (via drill 0.38)
  Top 0.203: U$11.P$1 20.7,15.2 v20.5,15 | U$12.1 21.25,4.25 v21,4.5
  Bottom 0.203: v20.5,15 20.25,14.75 20.25,12.75 20.38,12.62 20.38,6.38 20.25,6.25 20.25,5.25 v21,4.5
N$57  (via drill 0.38)
  Top 0.203: U$11.P$2 22.1,14.22 22,14.12 v21,14.12 | U$12.3 21.75,5 v21,5.75
  Bottom 0.203: v21,14.12 20.88,14 20.88,5.88 v21,5.75
N$58
  Top 0.203: U$11.P$3 22.5,13.75 22.25,13.5 21.12,13.5 20.25,12.62 20.25,7.5 22.25,5.5 U$12.5
N$59
  Top 0.203: U$11.P$4 22.9,13.4 22.5,13 21.5,13 20.75,12.25 20.75,7.75 22.75,5.75 U$12.7
N$60  (via drill 0.38)
  Top 0.203: U$11.P$5 23.3,13.32 v23.5,13.12 23.7,13.32 U$11.P$6 | v24.5,7.25 25.12,7.25 25.75,7.88 U$12.20
  Bottom 0.203: v23.5,13.12 25.38,13.12 25.75,12.75 25.75,7.88 25.12,7.25 v24.5,7.25
N$61
  Top 0.203: U$11.P$7 24.1,13.4 24.5,13 25.5,13 26.25,12.25 26.25,7.75 23.25,4.75 U$12.9
N$62
  Top 0.203: U$11.P$8 24.5,13.75 24.75,13.5 25.88,13.5 26.75,12.62 26.75,7.5 23.75,4.5 U$12.11
N$63  (via drill 0.38)
  Top 0.203: U$11.P$9 24.9,14.22 25,14.12 v26,14.12 | U$12.13 24.25,4.25 25.5,5.5 25.75,5.5 v26,5.75
  Bottom 0.203: v26,14.12 26.12,14 26.12,5.88 v26,5.75
N$64  (via drill 0.38)
  Top 0.203: U$11.P$10 26.3,15.2 v26.5,15 | v26,4.5 25.25,4.5 24.75,4 U$12.15
  Bottom 0.203: v26.5,15 26.75,14.75 26.75,12.75 26.62,12.62 26.62,6.38 26.75,6.25 26.75,5.25 v26,4.5
N$65
  Top 0.203: U$11.P$11 25.3,9.18 25.25,9.12 U$12.18
N$66
  Top 0.203: U$11.P$12 24.9,9.4 24.75,9.25 U$12.16
N$67
  Top 0.203: U$11.P$13 24.5,9.75 24.25,9.5 U$12.14
N$68
  Top 0.203: U$11.P$14 24.1,9.97 23.75,9.62 U$12.12
N$69
  Top 0.203: U$11.P$16 23.3,9.8 | 23.3,9.8 23.25,9.75 U$12.10 | U$11.P$15 23.7,10.2 23.3,9.8
N$70
  Top 0.203: U$11.P$17 22.9,10.15 22.75,10 U$12.8
N$71
  Top 0.203: U$11.P$18 22.5,10.5 22.25,10.25 U$12.6
N$72
  Top 0.203: U$11.P$19 22.1,10.85 21.75,10.5 U$12.4
N$73
  Top 0.203: U$11.P$20 21.7,11.45 21.25,11 U$12.2
N$74  (via drill 0.38)
  Top 0.203: U$14.P$1 5.7,49.2 v5.5,49 | U$15.1 6.25,38.25 v6,38.5
  Bottom 0.203: v5.5,49 5.25,48.75 5.25,46.75 5.38,46.62 5.38,40.38 5.25,40.25 5.25,39.25 v6,38.5
N$75  (via drill 0.38)
  Top 0.203: U$14.P$2 7.1,48.23 7,48.12 v6,48.12 | U$15.3 6.75,39 v6,39.75
  Bottom 0.203: v6,48.12 5.88,48 5.88,39.88 v6,39.75
N$76
  Top 0.203: U$14.P$3 7.5,47.75 7.25,47.5 6.12,47.5 5.25,46.62 5.25,41.5 7.25,39.5 U$15.5
N$77
  Top 0.203: U$14.P$4 7.9,47.4 7.5,47 6.5,47 5.75,46.25 5.75,41.75 7.75,39.75 U$15.7
N$78  (via drill 0.38)
  Top 0.203: U$14.P$5 8.3,47.33 v8.5,47.12 8.7,47.33 U$14.P$6 | v9.5,41.25 10.12,41.25 10.75,41.88 U$15.20
  Bottom 0.203: v8.5,47.12 10.38,47.12 10.75,46.75 10.75,41.88 10.12,41.25 v9.5,41.25
N$79
  Top 0.203: U$14.P$7 9.1,47.4 9.5,47 10.5,47 11.25,46.25 11.25,41.75 8.25,38.75 U$15.9
N$80
  Top 0.203: U$14.P$8 9.5,47.75 9.75,47.5 10.88,47.5 11.75,46.62 11.75,41.5 8.75,38.5 U$15.11
N$81  (via drill 0.38)
  Top 0.203: U$14.P$9 9.9,48.23 10,48.12 v11,48.12 | U$15.13 9.25,38.25 10.5,39.5 10.75,39.5 v11,39.75
  Bottom 0.203: v11,48.12 11.12,48 11.12,39.88 v11,39.75
N$82  (via drill 0.38)
  Top 0.203: U$14.P$10 11.3,49.2 v11.5,49 | v11,38.5 10.25,38.5 9.75,38 U$15.15
  Bottom 0.203: v11.5,49 11.75,48.75 11.75,46.75 11.62,46.62 11.62,40.38 11.75,40.25 11.75,39.25 v11,38.5
N$83
  Top 0.203: U$14.P$11 10.3,43.17 10.25,43.12 U$15.18
N$84
  Top 0.203: U$14.P$12 9.9,43.4 9.75,43.25 U$15.16
N$85
  Top 0.203: U$14.P$13 9.5,43.75 9.25,43.5 U$15.14
N$86
  Top 0.203: U$14.P$14 9.1,43.98 8.75,43.62 U$15.12
N$87
  Top 0.203: U$14.P$16 8.3,43.8 | 8.3,43.8 8.25,43.75 U$15.10 | U$14.P$15 8.7,44.2 8.3,43.8
N$88
  Top 0.203: U$14.P$17 7.9,44.15 7.75,44 U$15.8
N$89
  Top 0.203: U$14.P$18 7.5,44.5 7.25,44.25 U$15.6
N$90
  Top 0.203: U$14.P$19 7.1,44.85 6.75,44.5 U$15.4
N$91
  Top 0.203: U$14.P$20 6.7,45.45 6.25,45 U$15.2
N$92  (via drill 0.38)
  Top 0.203: U$17.P$1 5.7,66.2 v5.5,66 | U$18.1 6.25,55.25 v6,55.5
  Bottom 0.203: v5.5,66 5.25,65.75 5.25,63.75 5.38,63.62 5.38,57.38 5.25,57.25 5.25,56.25 v6,55.5
N$93  (via drill 0.38)
  Top 0.203: U$17.P$2 7.1,65.22 7,65.12 v6,65.12 | U$18.3 6.75,56 v6,56.75
  Bottom 0.203: v6,65.12 5.88,65 5.88,56.88 v6,56.75
N$94
  Top 0.203: U$17.P$3 7.5,64.75 7.25,64.5 6.12,64.5 5.25,63.62 5.25,58.5 7.25,56.5 U$18.5
N$95
  Top 0.203: U$17.P$4 7.9,64.4 7.5,64 6.5,64 5.75,63.25 5.75,58.75 7.75,56.75 U$18.7
N$96  (via drill 0.38)
  Top 0.203: U$17.P$5 8.3,64.33 v8.5,64.12 8.7,64.33 U$17.P$6 | v9.5,58.25 10.12,58.25 10.75,58.88 U$18.20
  Bottom 0.203: v8.5,64.12 10.38,64.12 10.75,63.75 10.75,58.88 10.12,58.25 v9.5,58.25
N$97
  Top 0.203: U$17.P$7 9.1,64.4 9.5,64 10.5,64 11.25,63.25 11.25,58.75 8.25,55.75 U$18.9
N$98
  Top 0.203: U$17.P$8 9.5,64.75 9.75,64.5 10.88,64.5 11.75,63.62 11.75,58.5 8.75,55.5 U$18.11
N$99  (via drill 0.38)
  Top 0.203: U$17.P$9 9.9,65.22 10,65.12 v11,65.12 | U$18.13 9.25,55.25 10.5,56.5 10.75,56.5 v11,56.75
  Bottom 0.203: v11,65.12 11.12,65 11.12,56.88 v11,56.75
N$100  (via drill 0.38)
  Top 0.203: U$17.P$10 11.3,66.2 v11.5,66 | v11,55.5 10.25,55.5 9.75,55 U$18.15
  Bottom 0.203: v11.5,66 11.75,65.75 11.75,63.75 11.62,63.62 11.62,57.38 11.75,57.25 11.75,56.25 v11,55.5
N$101
  Top 0.203: U$17.P$11 10.3,60.17 10.25,60.12 U$18.18
N$102
  Top 0.203: U$17.P$12 9.9,60.4 9.75,60.25 U$18.16
N$103
  Top 0.203: U$17.P$13 9.5,60.75 9.25,60.5 U$18.14
N$104
  Top 0.203: U$17.P$14 9.1,60.98 8.75,60.62 U$18.12
N$105
  Top 0.203: U$17.P$16 8.3,60.8 | 8.3,60.8 8.25,60.75 U$18.10 | U$17.P$15 8.7,61.2 8.3,60.8
N$106
  Top 0.203: U$17.P$17 7.9,61.15 7.75,61 U$18.8
N$107
  Top 0.203: U$17.P$18 7.5,61.5 7.25,61.25 U$18.6
N$108
  Top 0.203: U$17.P$19 7.1,61.85 6.75,61.5 U$18.4
N$109
  Top 0.203: U$17.P$20 6.7,62.45 6.25,62 U$18.2
N$110  (via drill 0.38)
  Top 0.203: U$20.P$1 20.7,66.2 v20.5,66 | U$21.1 21.25,55.25 v21,55.5
  Bottom 0.203: v20.5,66 20.25,65.75 20.25,63.75 20.38,63.62 20.38,57.38 20.25,57.25 20.25,56.25 v21,55.5
N$111  (via drill 0.38)
  Top 0.203: U$20.P$2 22.1,65.22 22,65.12 v21,65.12 | U$21.3 21.75,56 v21,56.75
  Bottom 0.203: v21,65.12 20.88,65 20.88,56.88 v21,56.75
N$112
  Top 0.203: U$20.P$3 22.5,64.75 22.25,64.5 21.12,64.5 20.25,63.62 20.25,58.5 22.25,56.5 U$21.5
N$113
  Top 0.203: U$20.P$4 22.9,64.4 22.5,64 21.5,64 20.75,63.25 20.75,58.75 22.75,56.75 U$21.7
N$114  (via drill 0.38)
  Top 0.203: U$20.P$5 23.3,64.33 v23.5,64.12 23.7,64.33 U$20.P$6 | v24.5,58.25 25.12,58.25 25.75,58.88 U$21.20
  Bottom 0.203: v23.5,64.12 25.38,64.12 25.75,63.75 25.75,58.88 25.12,58.25 v24.5,58.25
N$115
  Top 0.203: U$20.P$7 24.1,64.4 24.5,64 25.5,64 26.25,63.25 26.25,58.75 23.25,55.75 U$21.9
N$116
  Top 0.203: U$20.P$8 24.5,64.75 24.75,64.5 25.88,64.5 26.75,63.62 26.75,58.5 23.75,55.5 U$21.11
N$117  (via drill 0.38)
  Top 0.203: U$20.P$9 24.9,65.22 25,65.12 v26,65.12 | U$21.13 24.25,55.25 25.5,56.5 25.75,56.5 v26,56.75
  Bottom 0.203: v26,65.12 26.12,65 26.12,56.88 v26,56.75
N$118  (via drill 0.38)
  Top 0.203: U$20.P$10 26.3,66.2 v26.5,66 | v26,55.5 25.25,55.5 24.75,55 U$21.15
  Bottom 0.203: v26.5,66 26.75,65.75 26.75,63.75 26.62,63.62 26.62,57.38 26.75,57.25 26.75,56.25 v26,55.5
N$119
  Top 0.203: U$20.P$11 25.3,60.17 25.25,60.12 U$21.18
N$120
  Top 0.203: U$20.P$12 24.9,60.4 24.75,60.25 U$21.16
N$121
  Top 0.203: U$20.P$13 24.5,60.75 24.25,60.5 U$21.14
N$122
  Top 0.203: U$20.P$14 24.1,60.98 23.75,60.62 U$21.12
N$123
  Top 0.203: U$20.P$16 23.3,60.8 | 23.3,60.8 23.25,60.75 U$21.10 | U$20.P$15 23.7,61.2 23.3,60.8
N$124
  Top 0.203: U$20.P$17 22.9,61.15 22.75,61 U$21.8
N$125
  Top 0.203: U$20.P$18 22.5,61.5 22.25,61.25 U$21.6
N$126
  Top 0.203: U$20.P$19 22.1,61.85 21.75,61.5 U$21.4
N$127
  Top 0.203: U$20.P$20 21.7,62.45 21.25,62 U$21.2
N$128  (via drill 0.38)
  Top 0.203: U$23.P$1 20.7,49.2 v20.5,49 | U$24.1 21.25,38.25 v21,38.5
  Bottom 0.203: v20.5,49 20.25,48.75 20.25,46.75 20.38,46.62 20.38,40.38 20.25,40.25 20.25,39.25 v21,38.5
N$129  (via drill 0.38)
  Top 0.203: U$23.P$2 22.1,48.23 22,48.12 v21,48.12 | U$24.3 21.75,39 v21,39.75
  Bottom 0.203: v21,48.12 20.88,48 20.88,39.88 v21,39.75
N$130
  Top 0.203: U$23.P$3 22.5,47.75 22.25,47.5 21.12,47.5 20.25,46.62 20.25,41.5 22.25,39.5 U$24.5
N$131
  Top 0.203: U$23.P$4 22.9,47.4 22.5,47 21.5,47 20.75,46.25 20.75,41.75 22.75,39.75 U$24.7
N$132  (via drill 0.38)
  Top 0.203: U$23.P$5 23.3,47.33 v23.5,47.12 23.7,47.33 U$23.P$6 | v24.5,41.25 25.12,41.25 25.75,41.88 U$24.20
  Bottom 0.203: v23.5,47.12 25.38,47.12 25.75,46.75 25.75,41.88 25.12,41.25 v24.5,41.25
N$133
  Top 0.203: U$23.P$7 24.1,47.4 24.5,47 25.5,47 26.25,46.25 26.25,41.75 23.25,38.75 U$24.9
N$134
  Top 0.203: U$23.P$8 24.5,47.75 24.75,47.5 25.88,47.5 26.75,46.62 26.75,41.5 23.75,38.5 U$24.11
N$135  (via drill 0.38)
  Top 0.203: U$23.P$9 24.9,48.23 25,48.12 v26,48.12 | U$24.13 24.25,38.25 25.5,39.5 25.75,39.5 v26,39.75
  Bottom 0.203: v26,48.12 26.12,48 26.12,39.88 v26,39.75
N$136  (via drill 0.38)
  Top 0.203: U$23.P$10 26.3,49.2 v26.5,49 | v26,38.5 25.25,38.5 24.75,38 U$24.15
  Bottom 0.203: v26.5,49 26.75,48.75 26.75,46.75 26.62,46.62 26.62,40.38 26.75,40.25 26.75,39.25 v26,38.5
N$137
  Top 0.203: U$23.P$11 25.3,43.17 25.25,43.12 U$24.18
N$138
  Top 0.203: U$23.P$12 24.9,43.4 24.75,43.25 U$24.16
N$139
  Top 0.203: U$23.P$13 24.5,43.75 24.25,43.5 U$24.14
N$140
  Top 0.203: U$23.P$14 24.1,43.98 23.75,43.62 U$24.12
N$141
  Top 0.203: U$23.P$16 23.3,43.8 | 23.3,43.8 23.25,43.75 U$24.10 | U$23.P$15 23.7,44.2 23.3,43.8
N$142
  Top 0.203: U$23.P$17 22.9,44.15 22.75,44 U$24.8
N$143
  Top 0.203: U$23.P$18 22.5,44.5 22.25,44.25 U$24.6
N$144
  Top 0.203: U$23.P$19 22.1,44.85 21.75,44.5 U$24.4
N$145
  Top 0.203: U$23.P$20 21.7,45.45 21.25,45 U$24.2
N$146  (via drill 0.38)
  Top 0.203: U$26.P$1 35.7,15.2 v35.5,15 | U$27.1 36.25,4.25 v36,4.5
  Bottom 0.203: v35.5,15 35.25,14.75 35.25,12.75 35.38,12.62 35.38,6.38 35.25,6.25 35.25,5.25 v36,4.5
N$147  (via drill 0.38)
  Top 0.203: U$26.P$2 37.1,14.22 37,14.12 v36,14.12 | U$27.3 36.75,5 v36,5.75
  Bottom 0.203: v36,14.12 35.88,14 35.88,5.88 v36,5.75
N$148
  Top 0.203: U$26.P$3 37.5,13.75 37.25,13.5 36.12,13.5 35.25,12.62 35.25,7.5 37.25,5.5 U$27.5
N$149
  Top 0.203: U$26.P$4 37.9,13.4 37.5,13 36.5,13 35.75,12.25 35.75,7.75 37.75,5.75 U$27.7
N$150  (via drill 0.38)
  Top 0.203: U$26.P$5 38.3,13.32 v38.5,13.12 38.7,13.32 U$26.P$6 | v39.5,7.25 40.12,7.25 40.75,7.88 U$27.20
  Bottom 0.203: v38.5,13.12 40.38,13.12 40.75,12.75 40.75,7.88 40.12,7.25 v39.5,7.25
N$151
  Top 0.203: U$26.P$7 39.1,13.4 39.5,13 40.5,13 41.25,12.25 41.25,7.75 38.25,4.75 U$27.9
N$152
  Top 0.203: U$26.P$8 39.5,13.75 39.75,13.5 40.88,13.5 41.75,12.62 41.75,7.5 38.75,4.5 U$27.11
N$153  (via drill 0.38)
  Top 0.203: U$26.P$9 39.9,14.22 40,14.12 v41,14.12 | U$27.13 39.25,4.25 40.5,5.5 40.75,5.5 v41,5.75
  Bottom 0.203: v41,14.12 41.12,14 41.12,5.88 v41,5.75
N$154  (via drill 0.38)
  Top 0.203: U$26.P$10 41.3,15.2 v41.5,15 | v41,4.5 40.25,4.5 39.75,4 U$27.15
  Bottom 0.203: v41.5,15 41.75,14.75 41.75,12.75 41.62,12.62 41.62,6.38 41.75,6.25 41.75,5.25 v41,4.5
N$155
  Top 0.203: U$26.P$11 40.3,9.18 40.25,9.12 U$27.18
N$156
  Top 0.203: U$26.P$12 39.9,9.4 39.75,9.25 U$27.16
N$157
  Top 0.203: U$26.P$13 39.5,9.75 39.25,9.5 U$27.14
N$158
  Top 0.203: U$26.P$14 39.1,9.97 38.75,9.62 U$27.12
N$159
  Top 0.203: U$26.P$16 38.3,9.8 | 38.3,9.8 38.25,9.75 U$27.10 | U$26.P$15 38.7,10.2 38.3,9.8
N$160
  Top 0.203: U$26.P$17 37.9,10.15 37.75,10 U$27.8
N$161
  Top 0.203: U$26.P$18 37.5,10.5 37.25,10.25 U$27.6
N$162
  Top 0.203: U$26.P$19 37.1,10.85 36.75,10.5 U$27.4
N$163
  Top 0.203: U$26.P$20 36.7,11.45 36.25,11 U$27.2
N$164  (via drill 0.38)
  Top 0.203: U$29.P$1 35.7,32.2 v35.5,32 | U$30.1 36.25,21.25 v36,21.5
  Bottom 0.203: v35.5,32 35.25,31.75 35.25,29.75 35.38,29.62 35.38,23.38 35.25,23.25 35.25,22.25 v36,21.5
N$165  (via drill 0.38)
  Top 0.203: U$29.P$2 37.1,31.23 37,31.12 v36,31.12 | U$30.3 36.75,22 v36,22.75
  Bottom 0.203: v36,31.12 35.88,31 35.88,22.88 v36,22.75
N$166
  Top 0.203: U$29.P$3 37.5,30.75 37.25,30.5 36.12,30.5 35.25,29.62 35.25,24.5 37.25,22.5 U$30.5
N$167
  Top 0.203: U$29.P$4 37.9,30.4 37.5,30 36.5,30 35.75,29.25 35.75,24.75 37.75,22.75 U$30.7
N$168  (via drill 0.38)
  Top 0.203: U$29.P$5 38.3,30.32 v38.5,30.12 38.7,30.32 U$29.P$6 | v39.5,24.25 40.12,24.25 40.75,24.88 U$30.20
  Bottom 0.203: v38.5,30.12 40.38,30.12 40.75,29.75 40.75,24.88 40.12,24.25 v39.5,24.25
N$169
  Top 0.203: U$29.P$7 39.1,30.4 39.5,30 40.5,30 41.25,29.25 41.25,24.75 38.25,21.75 U$30.9
N$170
  Top 0.203: U$29.P$8 39.5,30.75 39.75,30.5 40.88,30.5 41.75,29.62 41.75,24.5 38.75,21.5 U$30.11
N$171  (via drill 0.38)
  Top 0.203: U$29.P$9 39.9,31.23 40,31.12 v41,31.12 | U$30.13 39.25,21.25 40.5,22.5 40.75,22.5 v41,22.75
  Bottom 0.203: v41,31.12 41.12,31 41.12,22.88 v41,22.75
N$172  (via drill 0.38)
  Top 0.203: U$29.P$10 41.3,32.2 v41.5,32 | v41,21.5 40.25,21.5 39.75,21 U$30.15
  Bottom 0.203: v41.5,32 41.75,31.75 41.75,29.75 41.62,29.62 41.62,23.38 41.75,23.25 41.75,22.25 v41,21.5
N$173
  Top 0.203: U$29.P$11 40.3,26.18 40.25,26.12 U$30.18
N$174
  Top 0.203: U$29.P$12 39.9,26.4 39.75,26.25 U$30.16
N$175
  Top 0.203: U$29.P$13 39.5,26.75 39.25,26.5 U$30.14
N$176
  Top 0.203: U$29.P$14 39.1,26.98 38.75,26.62 U$30.12
N$177
  Top 0.203: U$29.P$16 38.3,26.8 | 38.3,26.8 38.25,26.75 U$30.10 | U$29.P$15 38.7,27.2 38.3,26.8
N$178
  Top 0.203: U$29.P$17 37.9,27.15 37.75,27 U$30.8
N$179
  Top 0.203: U$29.P$18 37.5,27.5 37.25,27.25 U$30.6
N$180
  Top 0.203: U$29.P$19 37.1,27.85 36.75,27.5 U$30.4
N$181
  Top 0.203: U$29.P$20 36.7,28.45 36.25,28 U$30.2
N$182  (via drill 0.38)
  Top 0.203: U$32.P$1 50.7,32.2 v50.5,32 | U$33.1 51.25,21.25 v51,21.5
  Bottom 0.203: v50.5,32 50.25,31.75 50.25,29.75 50.38,29.62 50.38,23.38 50.25,23.25 50.25,22.25 v51,21.5
N$183  (via drill 0.38)
  Top 0.203: U$32.P$2 52.1,31.23 52,31.12 v51,31.12 | U$33.3 51.75,22 v51,22.75
  Bottom 0.203: v51,31.12 50.88,31 50.88,22.88 v51,22.75
N$184
  Top 0.203: U$32.P$3 52.5,30.75 52.25,30.5 51.12,30.5 50.25,29.62 50.25,24.5 52.25,22.5 U$33.5
N$185
  Top 0.203: U$32.P$4 52.9,30.4 52.5,30 51.5,30 50.75,29.25 50.75,24.75 52.75,22.75 U$33.7
N$186  (via drill 0.38)
  Top 0.203: U$32.P$5 53.3,30.32 v53.5,30.12 53.7,30.32 U$32.P$6 | v54.5,24.25 55.12,24.25 55.75,24.88 U$33.20
  Bottom 0.203: v53.5,30.12 55.38,30.12 55.75,29.75 55.75,24.88 55.12,24.25 v54.5,24.25
N$187
  Top 0.203: U$32.P$7 54.1,30.4 54.5,30 55.5,30 56.25,29.25 56.25,24.75 53.25,21.75 U$33.9
N$188
  Top 0.203: U$32.P$8 54.5,30.75 54.75,30.5 55.88,30.5 56.75,29.62 56.75,24.5 53.75,21.5 U$33.11
N$189  (via drill 0.38)
  Top 0.203: U$32.P$9 54.9,31.23 55,31.12 v56,31.12 | U$33.13 54.25,21.25 55.5,22.5 55.75,22.5 v56,22.75
  Bottom 0.203: v56,31.12 56.12,31 56.12,22.88 v56,22.75
N$190  (via drill 0.38)
  Top 0.203: U$32.P$10 56.3,32.2 v56.5,32 | v56,21.5 55.25,21.5 54.75,21 U$33.15
  Bottom 0.203: v56.5,32 56.75,31.75 56.75,29.75 56.62,29.62 56.62,23.38 56.75,23.25 56.75,22.25 v56,21.5
N$191
  Top 0.203: U$32.P$11 55.3,26.18 55.25,26.12 U$33.18
N$192
  Top 0.203: U$32.P$12 54.9,26.4 54.75,26.25 U$33.16
N$193
  Top 0.203: U$32.P$13 54.5,26.75 54.25,26.5 U$33.14
N$194
  Top 0.203: U$32.P$14 54.1,26.98 53.75,26.62 U$33.12
N$195
  Top 0.203: U$32.P$16 53.3,26.8 | 53.3,26.8 53.25,26.75 U$33.10 | U$32.P$15 53.7,27.2 53.3,26.8
N$196
  Top 0.203: U$32.P$17 52.9,27.15 52.75,27 U$33.8
N$197
  Top 0.203: U$32.P$18 52.5,27.5 52.25,27.25 U$33.6
N$198
  Top 0.203: U$32.P$19 52.1,27.85 51.75,27.5 U$33.4
N$199
  Top 0.203: U$32.P$20 51.7,28.45 51.25,28 U$33.2
N$200  (via drill 0.38)
  Top 0.203: U$35.P$1 50.7,15.2 v50.5,15 | U$36.1 51.25,4.25 v51,4.5
  Bottom 0.203: v50.5,15 50.25,14.75 50.25,12.75 50.38,12.62 50.38,6.38 50.25,6.25 50.25,5.25 v51,4.5
N$201  (via drill 0.38)
  Top 0.203: U$35.P$2 52.1,14.22 52,14.12 v51,14.12 | U$36.3 51.75,5 v51,5.75
  Bottom 0.203: v51,14.12 50.88,14 50.88,5.88 v51,5.75
N$202
  Top 0.203: U$35.P$3 52.5,13.75 52.25,13.5 51.12,13.5 50.25,12.62 50.25,7.5 52.25,5.5 U$36.5
N$203
  Top 0.203: U$35.P$4 52.9,13.4 52.5,13 51.5,13 50.75,12.25 50.75,7.75 52.75,5.75 U$36.7
N$204  (via drill 0.38)
  Top 0.203: U$35.P$5 53.3,13.32 v53.5,13.12 53.7,13.32 U$35.P$6 | v54.5,7.25 55.12,7.25 55.75,7.88 U$36.20
  Bottom 0.203: v53.5,13.12 55.38,13.12 55.75,12.75 55.75,7.88 55.12,7.25 v54.5,7.25
N$205
  Top 0.203: U$35.P$7 54.1,13.4 54.5,13 55.5,13 56.25,12.25 56.25,7.75 53.25,4.75 U$36.9
N$206
  Top 0.203: U$35.P$8 54.5,13.75 54.75,13.5 55.88,13.5 56.75,12.62 56.75,7.5 53.75,4.5 U$36.11
N$207  (via drill 0.38)
  Top 0.203: U$35.P$9 54.9,14.22 55,14.12 v56,14.12 | U$36.13 54.25,4.25 55.5,5.5 55.75,5.5 v56,5.75
  Bottom 0.203: v56,14.12 56.12,14 56.12,5.88 v56,5.75
N$208  (via drill 0.38)
  Top 0.203: U$35.P$10 56.3,15.2 v56.5,15 | v56,4.5 55.25,4.5 54.75,4 U$36.15
  Bottom 0.203: v56.5,15 56.75,14.75 56.75,12.75 56.62,12.62 56.62,6.38 56.75,6.25 56.75,5.25 v56,4.5
N$209
  Top 0.203: U$35.P$11 55.3,9.18 55.25,9.12 U$36.18
N$210
  Top 0.203: U$35.P$12 54.9,9.4 54.75,9.25 U$36.16
N$211
  Top 0.203: U$35.P$13 54.5,9.75 54.25,9.5 U$36.14
N$212
  Top 0.203: U$35.P$14 54.1,9.97 53.75,9.62 U$36.12
N$213
  Top 0.203: U$35.P$16 53.3,9.8 | 53.3,9.8 53.25,9.75 U$36.10 | U$35.P$15 53.7,10.2 53.3,9.8
N$214
  Top 0.203: U$35.P$17 52.9,10.15 52.75,10 U$36.8
N$215
  Top 0.203: U$35.P$18 52.5,10.5 52.25,10.25 U$36.6
N$216
  Top 0.203: U$35.P$19 52.1,10.85 51.75,10.5 U$36.4
N$217
  Top 0.203: U$35.P$20 51.7,11.45 51.25,11 U$36.2
N$218  (via drill 0.38)
  Top 0.203: U$38.P$1 65.7,15.2 v65.5,15 | U$39.1 66.25,4.25 v66,4.5
  Bottom 0.203: v65.5,15 65.25,14.75 65.25,12.75 65.38,12.62 65.38,6.38 65.25,6.25 65.25,5.25 v66,4.5
N$219  (via drill 0.38)
  Top 0.203: U$38.P$2 67.1,14.22 67,14.12 v66,14.12 | U$39.3 66.75,5 v66,5.75
  Bottom 0.203: v66,14.12 65.88,14 65.88,5.88 v66,5.75
N$220
  Top 0.203: U$38.P$3 67.5,13.75 67.25,13.5 66.12,13.5 65.25,12.62 65.25,7.5 67.25,5.5 U$39.5
N$221
  Top 0.203: U$38.P$4 67.9,13.4 67.5,13 66.5,13 65.75,12.25 65.75,7.75 67.75,5.75 U$39.7
N$222  (via drill 0.38)
  Top 0.203: U$38.P$5 68.3,13.32 v68.5,13.12 68.7,13.32 U$38.P$6 | v69.5,7.25 70.12,7.25 70.75,7.88 U$39.20
  Bottom 0.203: v68.5,13.12 70.38,13.12 70.75,12.75 70.75,7.88 70.12,7.25 v69.5,7.25
N$223
  Top 0.203: U$38.P$7 69.1,13.4 69.5,13 70.5,13 71.25,12.25 71.25,7.75 68.25,4.75 U$39.9
N$224
  Top 0.203: U$38.P$8 69.5,13.75 69.75,13.5 70.88,13.5 71.75,12.62 71.75,7.5 68.75,4.5 U$39.11
N$225  (via drill 0.38)
  Top 0.203: U$38.P$9 69.9,14.22 70,14.12 v71,14.12 | U$39.13 69.25,4.25 70.5,5.5 70.75,5.5 v71,5.75
  Bottom 0.203: v71,14.12 71.12,14 71.12,5.88 v71,5.75
N$226  (via drill 0.38)
  Top 0.203: U$38.P$10 71.3,15.2 v71.5,15 | v71,4.5 70.25,4.5 69.75,4 U$39.15
  Bottom 0.203: v71.5,15 71.75,14.75 71.75,12.75 71.62,12.62 71.62,6.38 71.75,6.25 71.75,5.25 v71,4.5
N$227
  Top 0.203: U$38.P$11 70.3,9.18 70.25,9.12 U$39.18
N$228
  Top 0.203: U$38.P$12 69.9,9.4 69.75,9.25 U$39.16
N$229
  Top 0.203: U$38.P$13 69.5,9.75 69.25,9.5 U$39.14
N$230
  Top 0.203: U$38.P$14 69.1,9.97 68.75,9.62 U$39.12
N$231
  Top 0.203: U$38.P$16 68.3,9.8 | 68.3,9.8 68.25,9.75 U$39.10 | U$38.P$15 68.7,10.2 68.3,9.8
N$232
  Top 0.203: U$38.P$17 67.9,10.15 67.75,10 U$39.8
N$233
  Top 0.203: U$38.P$18 67.5,10.5 67.25,10.25 U$39.6
N$234
  Top 0.203: U$38.P$19 67.1,10.85 66.75,10.5 U$39.4
N$235
  Top 0.203: U$38.P$20 66.7,11.45 66.25,11 U$39.2
N$236  (via drill 0.38)
  Top 0.203: U$41.P$1 65.7,32.2 v65.5,32 | U$42.1 66.25,21.25 v66,21.5
  Bottom 0.203: v65.5,32 65.25,31.75 65.25,29.75 65.38,29.62 65.38,23.38 65.25,23.25 65.25,22.25 v66,21.5
N$237  (via drill 0.38)
  Top 0.203: U$41.P$2 67.1,31.23 67,31.12 v66,31.12 | U$42.3 66.75,22 v66,22.75
  Bottom 0.203: v66,31.12 65.88,31 65.88,22.88 v66,22.75
N$238
  Top 0.203: U$41.P$3 67.5,30.75 67.25,30.5 66.12,30.5 65.25,29.62 65.25,24.5 67.25,22.5 U$42.5
N$239
  Top 0.203: U$41.P$4 67.9,30.4 67.5,30 66.5,30 65.75,29.25 65.75,24.75 67.75,22.75 U$42.7
N$240  (via drill 0.38)
  Top 0.203: U$41.P$5 68.3,30.32 v68.5,30.12 68.7,30.32 U$41.P$6 | v69.5,24.25 70.12,24.25 70.75,24.88 U$42.20
  Bottom 0.203: v68.5,30.12 70.38,30.12 70.75,29.75 70.75,24.88 70.12,24.25 v69.5,24.25
N$241
  Top 0.203: U$41.P$7 69.1,30.4 69.5,30 70.5,30 71.25,29.25 71.25,24.75 68.25,21.75 U$42.9
N$242
  Top 0.203: U$41.P$8 69.5,30.75 69.75,30.5 70.88,30.5 71.75,29.62 71.75,24.5 68.75,21.5 U$42.11
N$243  (via drill 0.38)
  Top 0.203: U$41.P$9 69.9,31.23 70,31.12 v71,31.12 | U$42.13 69.25,21.25 70.5,22.5 70.75,22.5 v71,22.75
  Bottom 0.203: v71,31.12 71.12,31 71.12,22.88 v71,22.75
N$244  (via drill 0.38)
  Top 0.203: U$41.P$10 71.3,32.2 v71.5,32 | v71,21.5 70.25,21.5 69.75,21 U$42.15
  Bottom 0.203: v71.5,32 71.75,31.75 71.75,29.75 71.62,29.62 71.62,23.38 71.75,23.25 71.75,22.25 v71,21.5
N$245
  Top 0.203: U$41.P$11 70.3,26.18 70.25,26.12 U$42.18
N$246